# EAGLE board clock-orig (EAGLE 5.11)
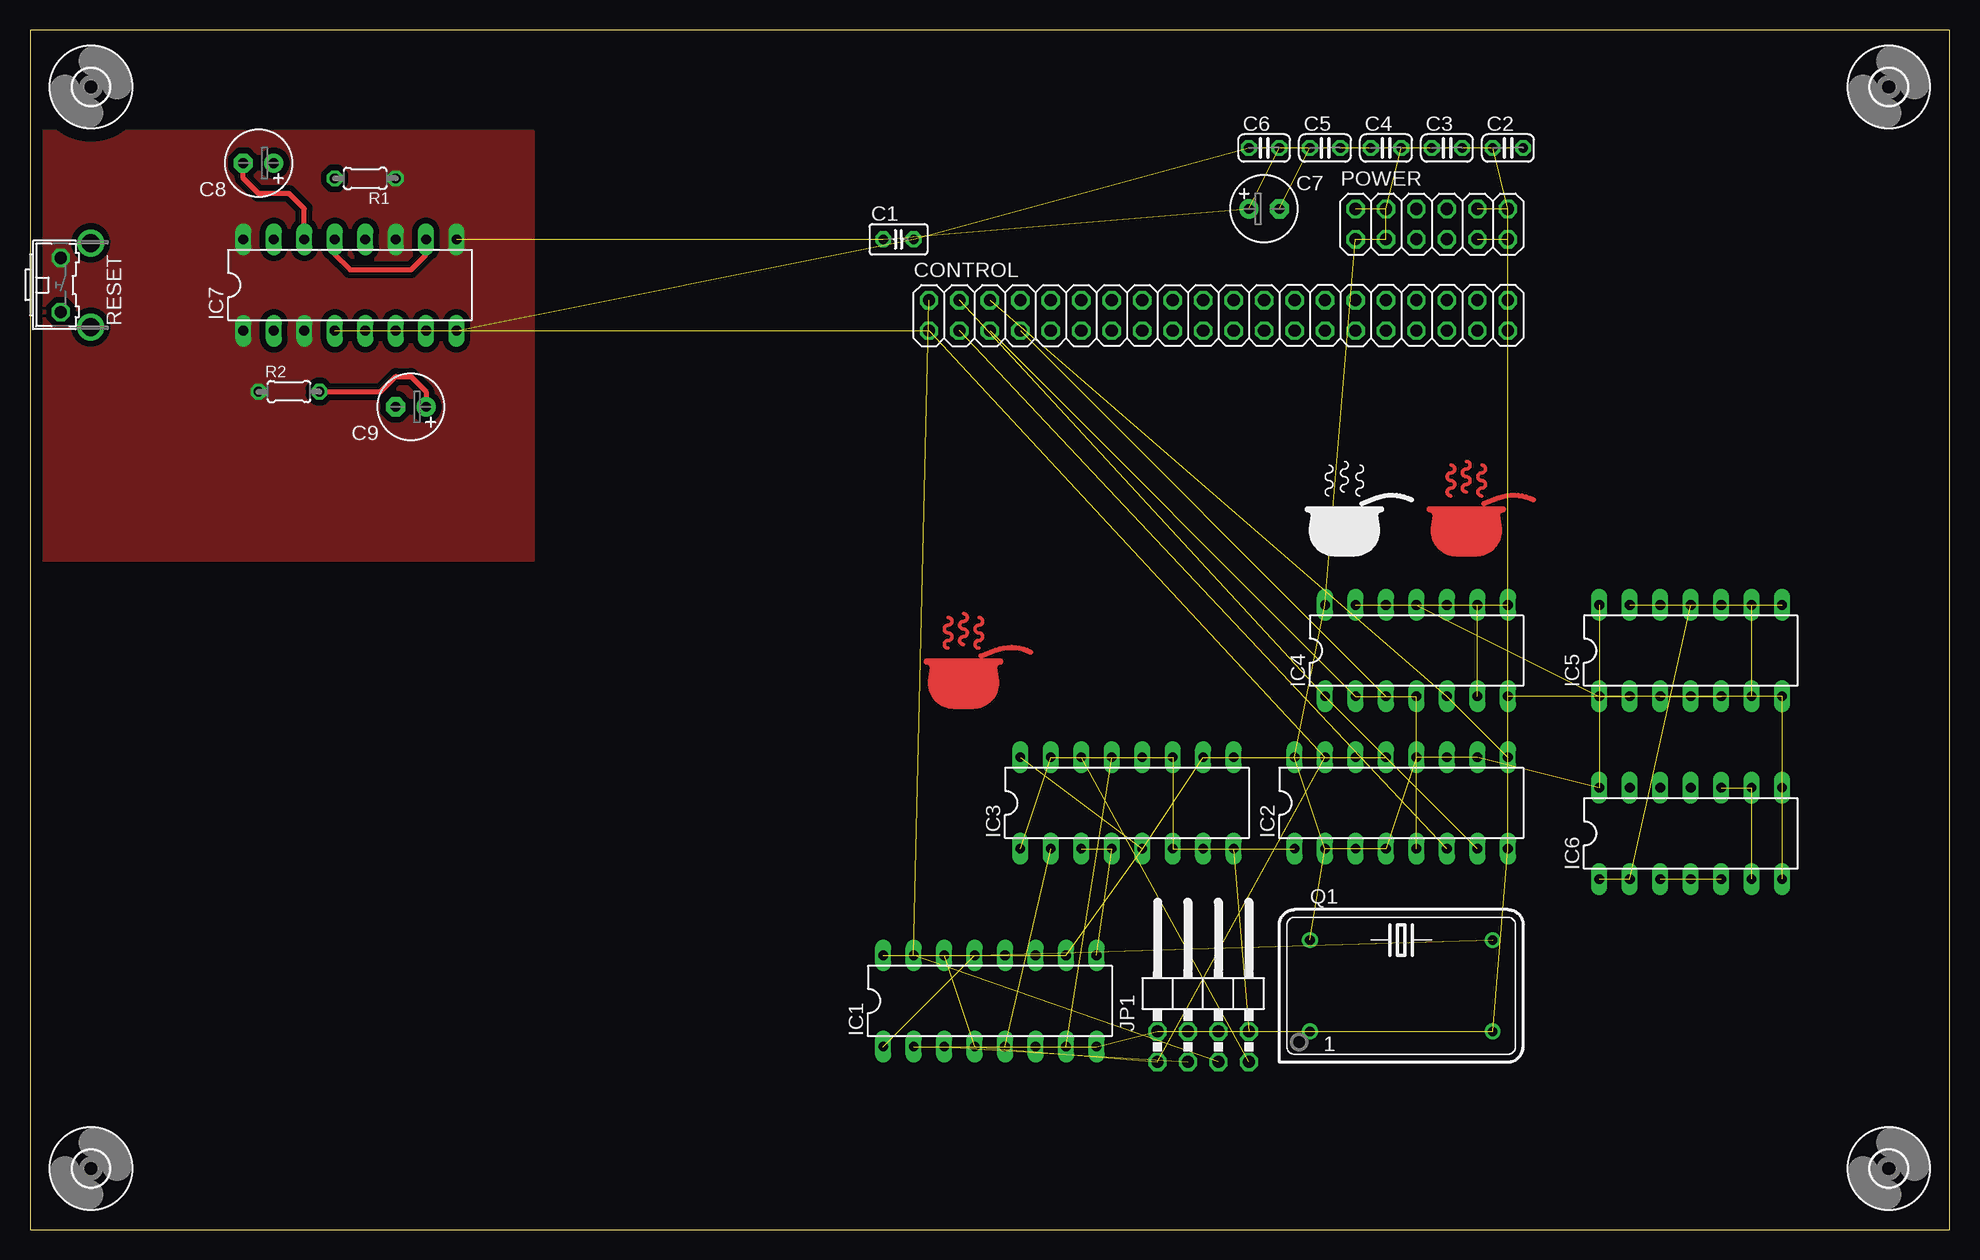
[diagram p0: board, top side]
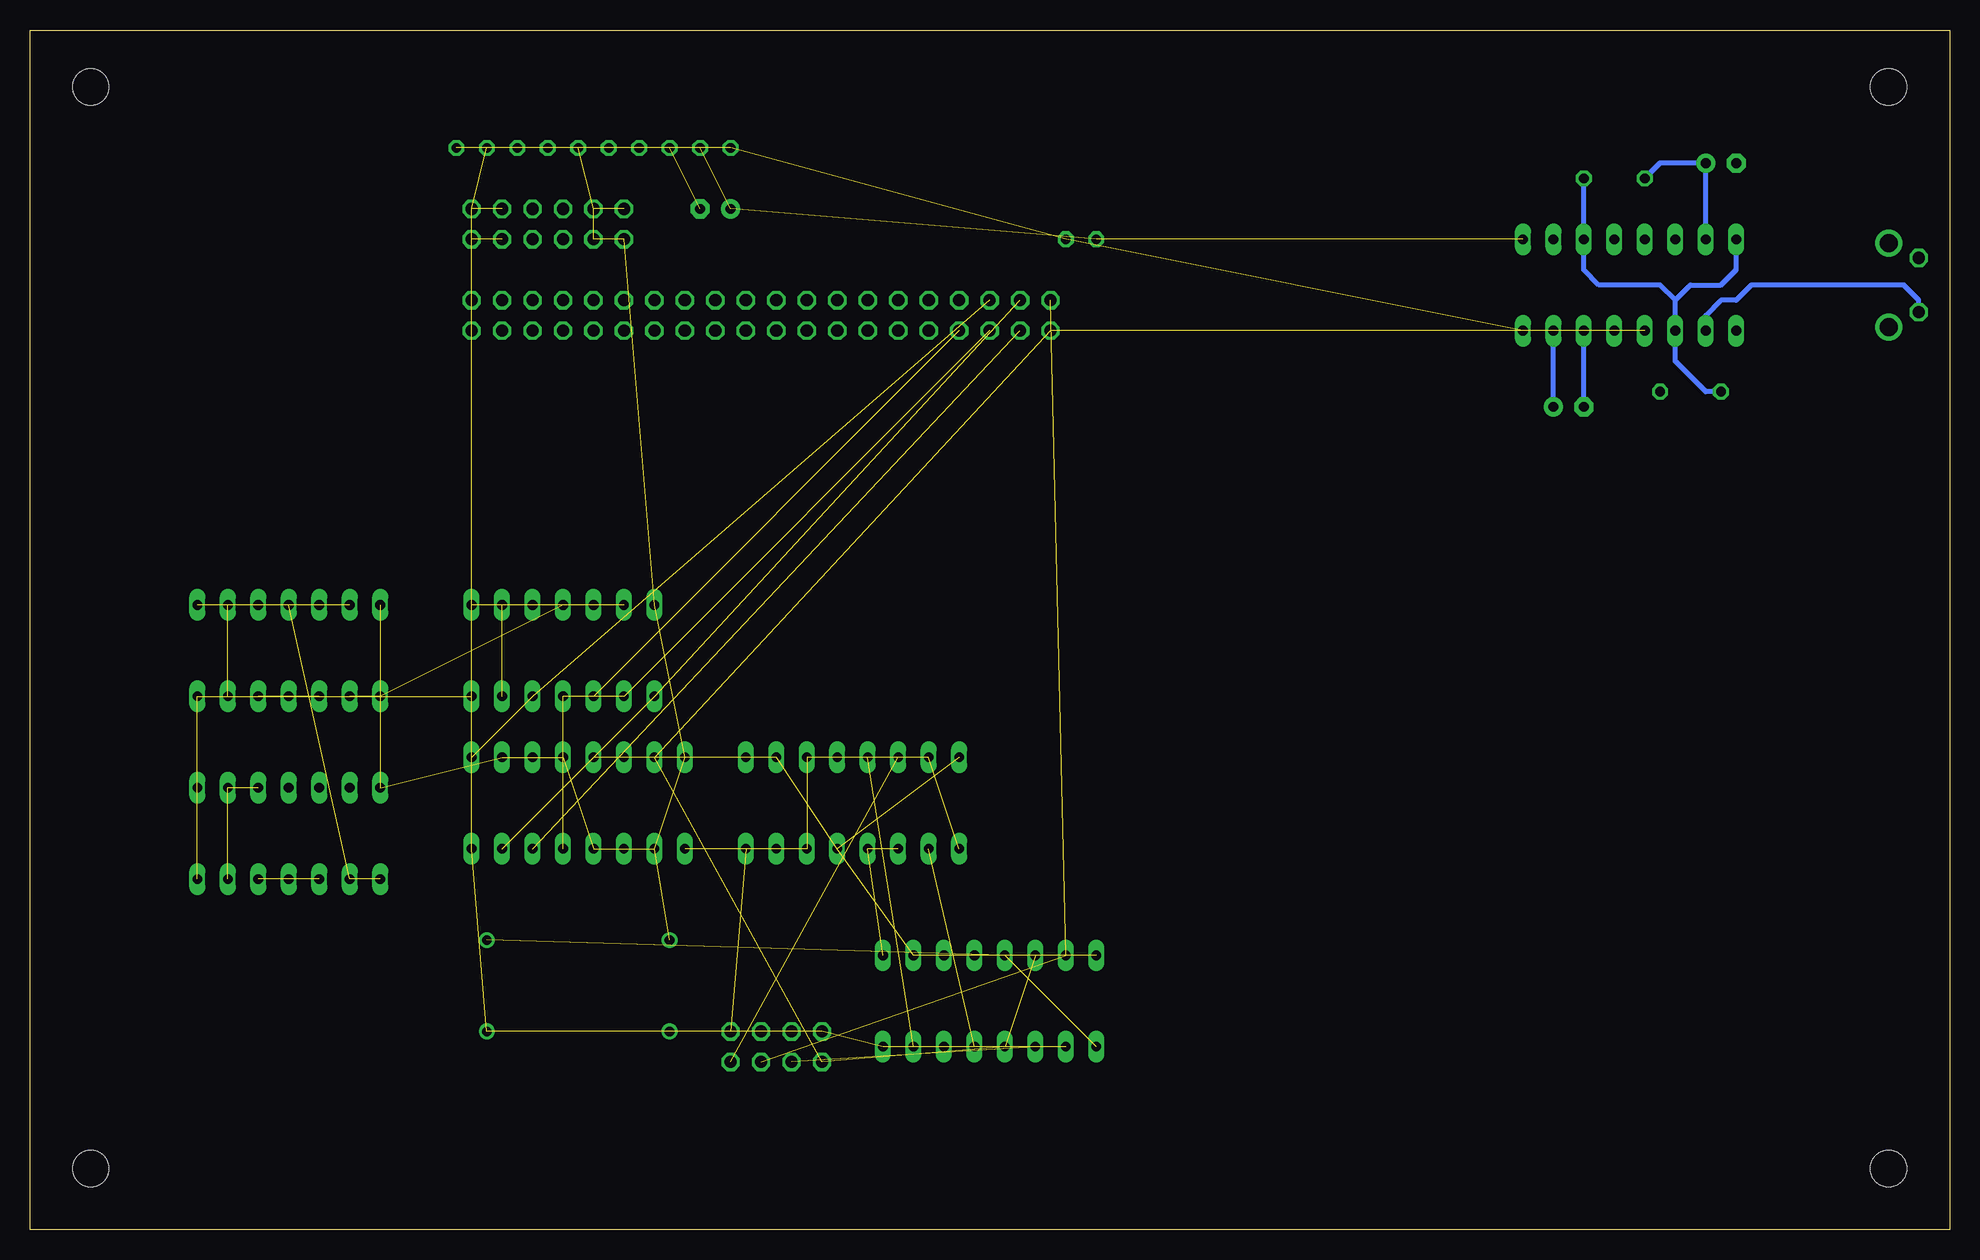
[diagram p1: board, bottom side, seen from below]

Size 160 x 100 mm. Coordinates in mm from the lower left corner, seen from the top.
Outline: 0,0 160,0 160,100 0,100 0,0
Copper layers (1*16): Top 0.035mm / dielectric 1.5mm / Bottom 0.035mm
Design rules "default": minimum track width 10mil, minimum drill 24mil, track to track 8mil, track to pad 8mil, pad to pad 8mil, via to via 8mil, smd to smd 8mil, copper to edge 40mil, drill to drill 8mil, minimum pad ring 10mil, minimum via ring 8mil, stop-mask expansion 4mil, vias tented up to drill 0mil, thermal gap 10mil

## Footprints (pad centres in the part's own frame; a part is rotated, then mirrored left to right if it is on the bottom)
C025-025X050 = drill 0.813 octagon: 1 -1.27,0; 2 1.27,0
C025-024X044 = drill 0.813 octagon: 1 -1.27,0; 2 1.27,0
E2,5-6 = drill 0.813 pad 1.6 round: + -1.27,0 | drill 0.813 pad 1.6 octagon: - 1.27,0
2X20 = drill 1.016 octagon: 1 -24.13,-1.27; 2 -24.13,1.27; 3 -21.59,-1.27; 4 -21.59,1.27; 5 -19.05,-1.27; 6 -19.05,1.27; 7 -16.51,-1.27; 8 -16.51,1.27; 9 -13.97,-1.27; 10 -13.97,1.27; 11 -11.43,-1.27; 12 -11.43,1.27; 13 -8.89,-1.27; 14 -8.89,1.27; 15 -6.35,-1.27; 16 -6.35,1.27; 17 -3.81,-1.27; 18 -3.81,1.27; 19 -1.27,-1.27; 20 -1.27,1.27; 21 1.27,-1.27; 22 1.27,1.27; 23 3.81,-1.27; 24 3.81,1.27; 25 6.35,-1.27; 26 6.35,1.27; 27 8.89,-1.27; 28 8.89,1.27; 29 11.43,-1.27; 30 11.43,1.27; 31 13.97,-1.27; 32 13.97,1.27; 33 16.51,-1.27; 34 16.51,1.27; 35 19.05,-1.27; 36 19.05,1.27; 37 21.59,-1.27; 38 21.59,1.27; 39 24.13,-1.27; 40 24.13,1.27
3,0 = hole 3: 0,0
DIL16 = drill 0.813 long: 1 -8.89,-3.81; 2 -6.35,-3.81; 3 -3.81,-3.81; 4 -1.27,-3.81; 5 1.27,-3.81; 6 3.81,-3.81; 7 6.35,-3.81; 8 8.89,-3.81; 9 8.89,3.81; 10 6.35,3.81; 11 3.81,3.81; 12 1.27,3.81; 13 -1.27,3.81; 14 -3.81,3.81; 15 -6.35,3.81; 16 -8.89,3.81
DIL14 = drill 0.813 long: 1 -7.62,-3.81; 2 -5.08,-3.81; 3 -2.54,-3.81; 4 0,-3.81; 5 2.54,-3.81; 6 5.08,-3.81; 7 7.62,-3.81; 8 7.62,3.81; 9 5.08,3.81; 10 2.54,3.81; 11 0,3.81; 12 -2.54,3.81; 13 -5.08,3.81; 14 -7.62,3.81
2X04/90 = drill 1.016 octagon: 1 -3.81,-6.35; 2 -3.81,-3.81; 3 -1.27,-6.35; 4 -1.27,-3.81; 5 1.27,-6.35; 6 1.27,-3.81; 7 3.81,-6.35; 8 3.81,-3.81
2X06 = drill 1.016 octagon: 1 -6.35,-1.27; 2 -6.35,1.27; 3 -3.81,-1.27; 4 -3.81,1.27; 5 -1.27,-1.27; 6 -1.27,1.27; 7 1.27,-1.27; 8 1.27,1.27; 9 3.81,-1.27; 10 3.81,1.27; 11 6.35,-1.27; 12 6.35,1.27
DIL14S = drill 0.813 round: 1 -7.62,-3.81; 7 7.62,-3.81; 8 7.62,3.81; 14 -7.62,3.81
0204/5 = drill 0.813 octagon: 1 -2.54,0; 2 2.54,0
B3F-31XX = drill 1.016 octagon: 1 -2.261,-1.245; 2 2.261,-1.245 | drill 1.499 pad 2.159 round: 3 -3.505,1.245; 4 3.505,1.245

## Placement (x,y rotation side)
C1  [C025-025X050]  72.39,82.55 0 top
C2  [C025-024X044]  123.19,90.17 0 top
C3  [C025-024X044]  118.11,90.17 0 top
C4  [C025-024X044]  113.03,90.17 0 top
C5  [C025-024X044]  107.95,90.17 0 top
C6  [C025-024X044]  102.87,90.17 0 top
C7  [E2,5-6]  102.87,85.09 0 top
C8  0.1uF  [E2,5-6]  19.05,88.9 180 top
C9  1uF  [E2,5-6]  31.75,68.58 180 top
CONTROL  [2X20]  99.06,76.2 0 top
H1  MOUNT-HOLE3.0  [3,0]  154.94,5.08 0 top
H2  MOUNT-HOLE3.0  [3,0]  5.08,5.08 0 top
H3  MOUNT-HOLE3.0  [3,0]  5.08,95.25 0 top
H4  MOUNT-HOLE3.0  [3,0]  154.94,95.25 0 top
IC1  74HCT112N  [DIL16]  80.01,19.05 0 top
IC2  74HCT112N  [DIL16]  114.3,35.56 0 top
IC3  74HCT253N  [DIL16]  91.44,35.56 0 top
IC4  74HCT00N  [DIL14]  115.57,48.26 0 top
IC5  74HCT00N  [DIL14]  138.43,48.26 0 top
IC6  74HCT00N  [DIL14]  138.43,33.02 0 top
IC7  74123N  [DIL16]  26.67,78.74 0 top
JP1  [2X04/90]  97.79,20.32 0 top
POWER  [2X06]  116.84,83.82 0 top
Q1  16.000MHz  [DIL14S]  114.3,20.32 0 top
R1  470K  [0204/5]  27.94,87.63 180 top
R2  470K  [0204/5]  21.59,69.85 0 top
RESET  [B3F-31XX]  3.81,78.74 270 top
U$1  SIGNATUREPLANE  [SIGNATURE_PLANE]  74.93,43.18 0 top
U$2  SIGNATUREPLANE  [SIGNATURE_PLANE]  116.84,55.88 0 top
U$3  SIGNATURESILK  [SIGNATURE]  106.68,55.88 0 top

## Library data of the parts
C1-C9 = rcl
CONTROL JP1 POWER = pinhead
H1-H4 = holes
IC1-IC7 = 74xx-eu
Q1 = crystal
R1 R2 = resistor
RESET = switch-omron
U$1-U$3 = alexios

## Nets
-CLK: IC1.7 IC3.12 IC3.13
-CLKEN: IC1.6
-HALT: CONTROL.2 IC1.15 JP1.5
-RESET: CONTROL.1 IC1.4 IC1.14 IC2.14 IC2.15 IC7.4 JP1.1
-RSTHOLD: IC7.12
CLK: IC1.9 IC3.3 IC3.4
CLK1: IC2.1 IC3.7
CLKEN: IC1.5 IC3.2
CLOCK: CONTROL.3 IC2.6
CLOCK2: CONTROL.4 IC2.7 IC4.1
CLOCK3: CONTROL.5 IC2.5 IC4.2 IC4.4
CLOCK4: CONTROL.6 IC2.9 IC4.5
CLOCK14: CONTROL.7 IC4.3
GND: C1.2 C2.1 C3.1 C4.1 C5.1 C6.1 C7.- IC1.2 IC1.8 IC2.8 IC3.1 IC3.6 IC3.8 IC3.11 IC3.15 IC4.7 IC5.7 IC6.7 IC7.8 JP1.2 JP1.4 JP1.6 JP1.8 POWER.9 POWER.10 POWER.11 POWER.12 Q1.7
N$1: IC1.1 IC1.13 Q1.8
N$2: IC5.3 IC5.4 IC5.5
N$3: C9.+ IC7.7 R2.2
N$4: C8.+ IC7.15 R1.2
N$5: C8.- IC7.14
N$6: C9.- IC7.6
N$7: IC5.6 IC5.9 IC5.10
N$8: IC5.8 IC5.12 IC5.13
N$10: IC5.11 IC6.1 IC6.2
N$11: IC6.3 IC6.4 IC6.5
N$12: IC6.6 IC6.9 IC6.10
N$13: IC6.8
N$15: IC4.6 IC4.9 IC4.10
N$16: IC4.8 IC4.12 IC4.13
N$18: IC4.11 IC5.1 IC5.2
NCLK1: IC2.13 IC3.9
RESET: IC7.10 IC7.13
RESET-IN: IC7.2 RESET.2
RSTHOLD: IC7.5
RUN: IC1.3 JP1.3
STEP: IC3.14 JP1.7
VCC: C1.1 C2.2 C3.2 C4.2 C5.2 C6.2 C7.+ IC1.10 IC1.11 IC1.12 IC1.16 IC2.2 IC2.3 IC2.4 IC2.10 IC2.11 IC2.12 IC2.16 IC3.5 IC3.10 IC3.16 IC4.14 IC5.14 IC6.14 IC7.1 IC7.3 IC7.9 IC7.11 IC7.16 POWER.1 POWER.2 POWER.3 POWER.4 Q1.14 R1.1 R2.1 RESET.1

## Tracks (layer width: path | path; a pad name or v marks a point on that pad's centre or on a via)
-CLK  (2 unrouted)
-HALT  (2 unrouted)
-RESET  (6 unrouted)
CLK  (2 unrouted)
CLK1  (1 unrouted)
CLKEN  (1 unrouted)
CLOCK  (1 unrouted)
CLOCK2  (2 unrouted)
CLOCK3  (3 unrouted)
CLOCK4  (2 unrouted)
CLOCK14  (1 unrouted)
GND  (27 unrouted)
N$1  (2 unrouted)
N$2  (2 unrouted)
N$3
  Top 0.406: R2.2 29.21,69.85 30.48,71.12 31.75,71.12 33.02,69.85 C9.+
  Bottom 0.406: C9.+ IC7.7
N$4
  Bottom 0.406: IC7.15 C8.+ 24.13,88.9 R1.2
N$5
  Top 0.406: C8.- 17.78,87.63 19.05,86.36 21.59,86.36 22.86,85.09 IC7.14
N$6
  Bottom 0.406: C9.- IC7.6
N$7  (2 unrouted)
N$8  (2 unrouted)
N$10  (2 unrouted)
N$11  (2 unrouted)
N$12  (2 unrouted)
N$15  (2 unrouted)
N$16  (2 unrouted)
N$18  (2 unrouted)
NCLK1  (1 unrouted)
RESET
  Top 0.406: IC7.13 25.4,81.28 26.67,80.01 31.75,80.01 33.02,81.28 IC7.10
RESET-IN
  Bottom 0.406: RESET.2 2.56,77.5 3.81,78.74 16.51,78.74 17.78,77.47 19.05,77.47 20.32,76.2 IC7.2
RUN  (1 unrouted)
STEP  (1 unrouted)
VCC  (29 unrouted)
  Bottom 0.406: R1.1 IC7.11 30.48,80.01 29.21,78.74 24.13,78.74 22.86,77.47 | R2.1 20.32,69.85 22.86,72.39 IC7.3 22.86,77.47 | IC7.16 17.78,80.01 19.05,78.74 21.59,78.74 22.86,77.47
  pour Top (isolate 0.508, no thermals): 0,91.44 0,55.88 41.91,55.88 41.91,91.44